# Altium PCB power_out.PcbDoc
Units mm, origin at the board's own origin, x right, y up, seen from the top; angles counter-clockwise.
Board outline 137.5 x 113 mm, 2 copper layers (Top Layer, Bottom Layer); 52 components, 28 nets, 141 pads, 0 vias.
Unrouted connection lines stored in the file: 92.
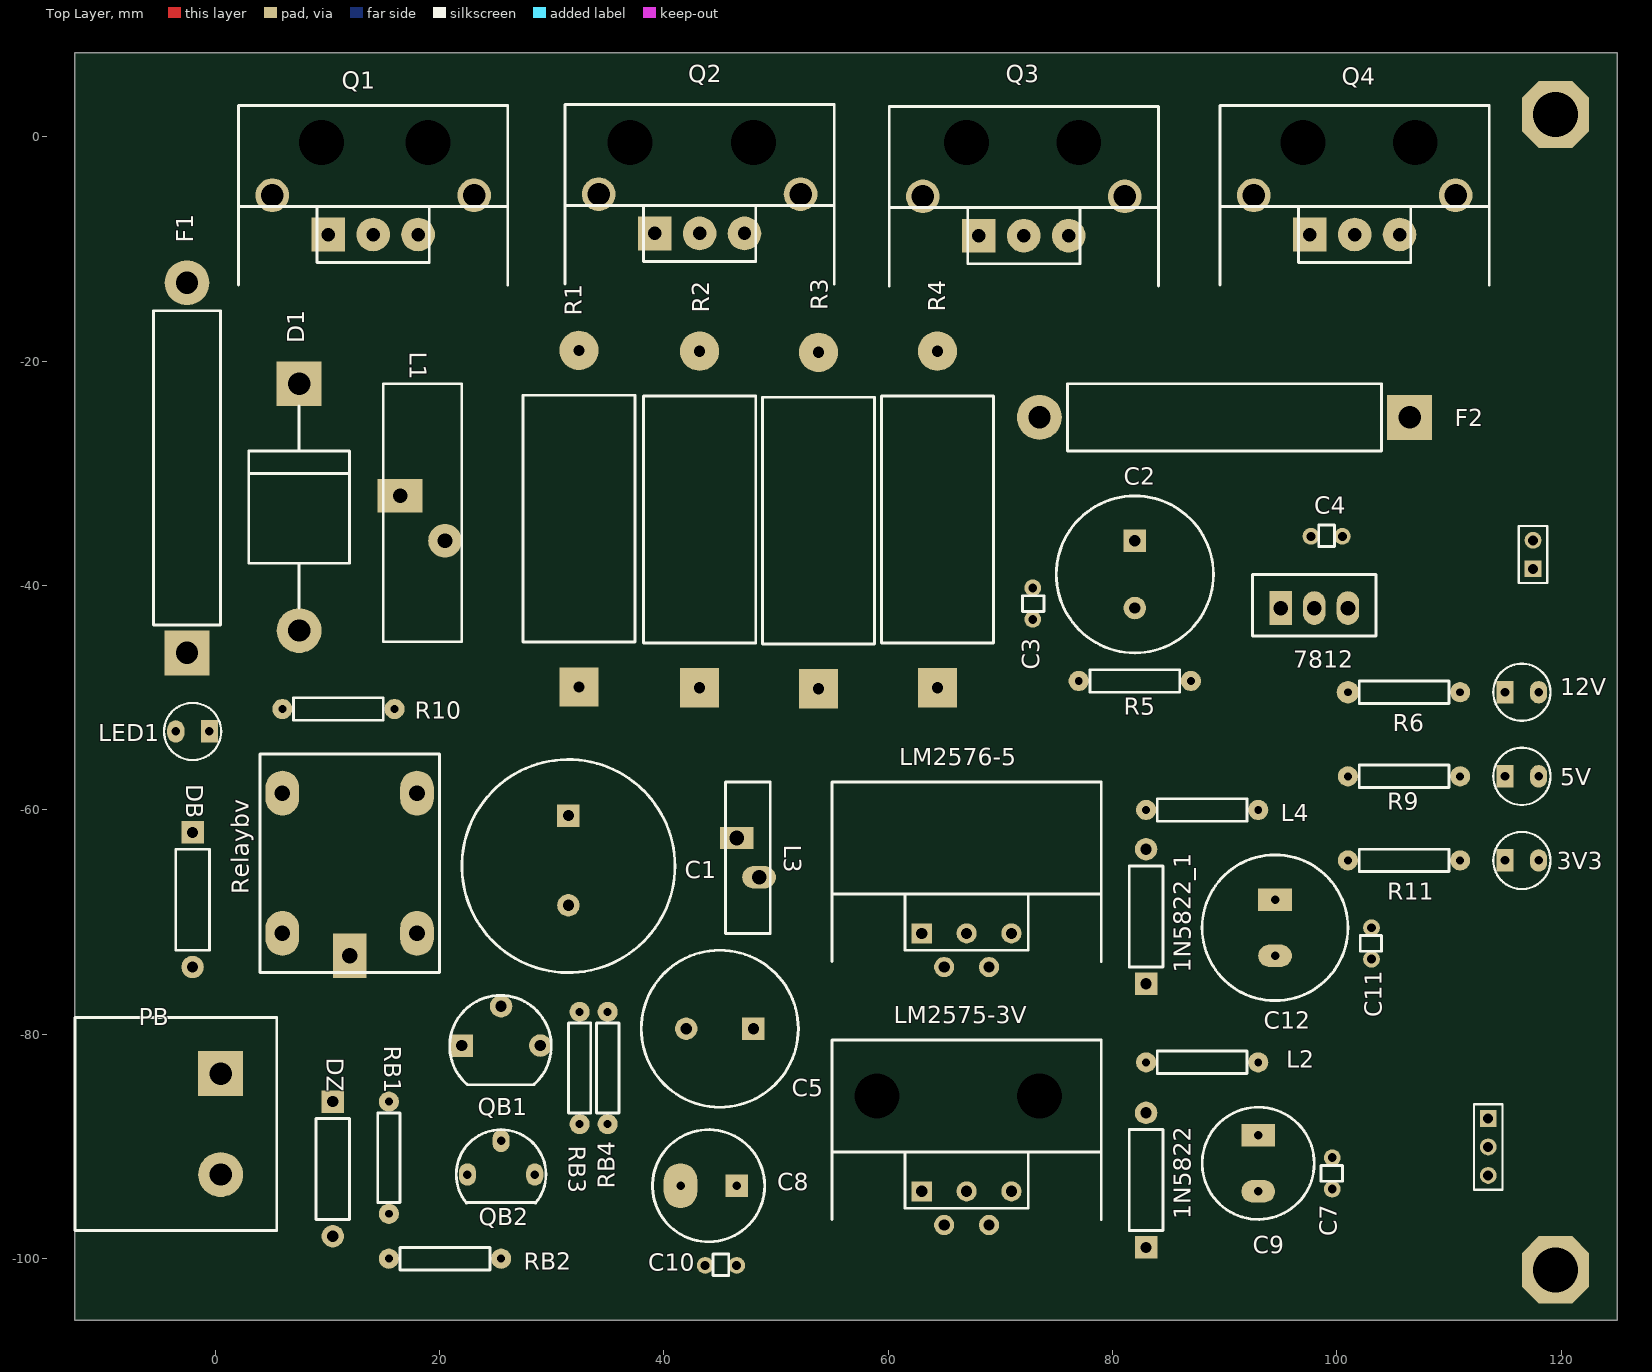
[diagram p0: Top Layer view]
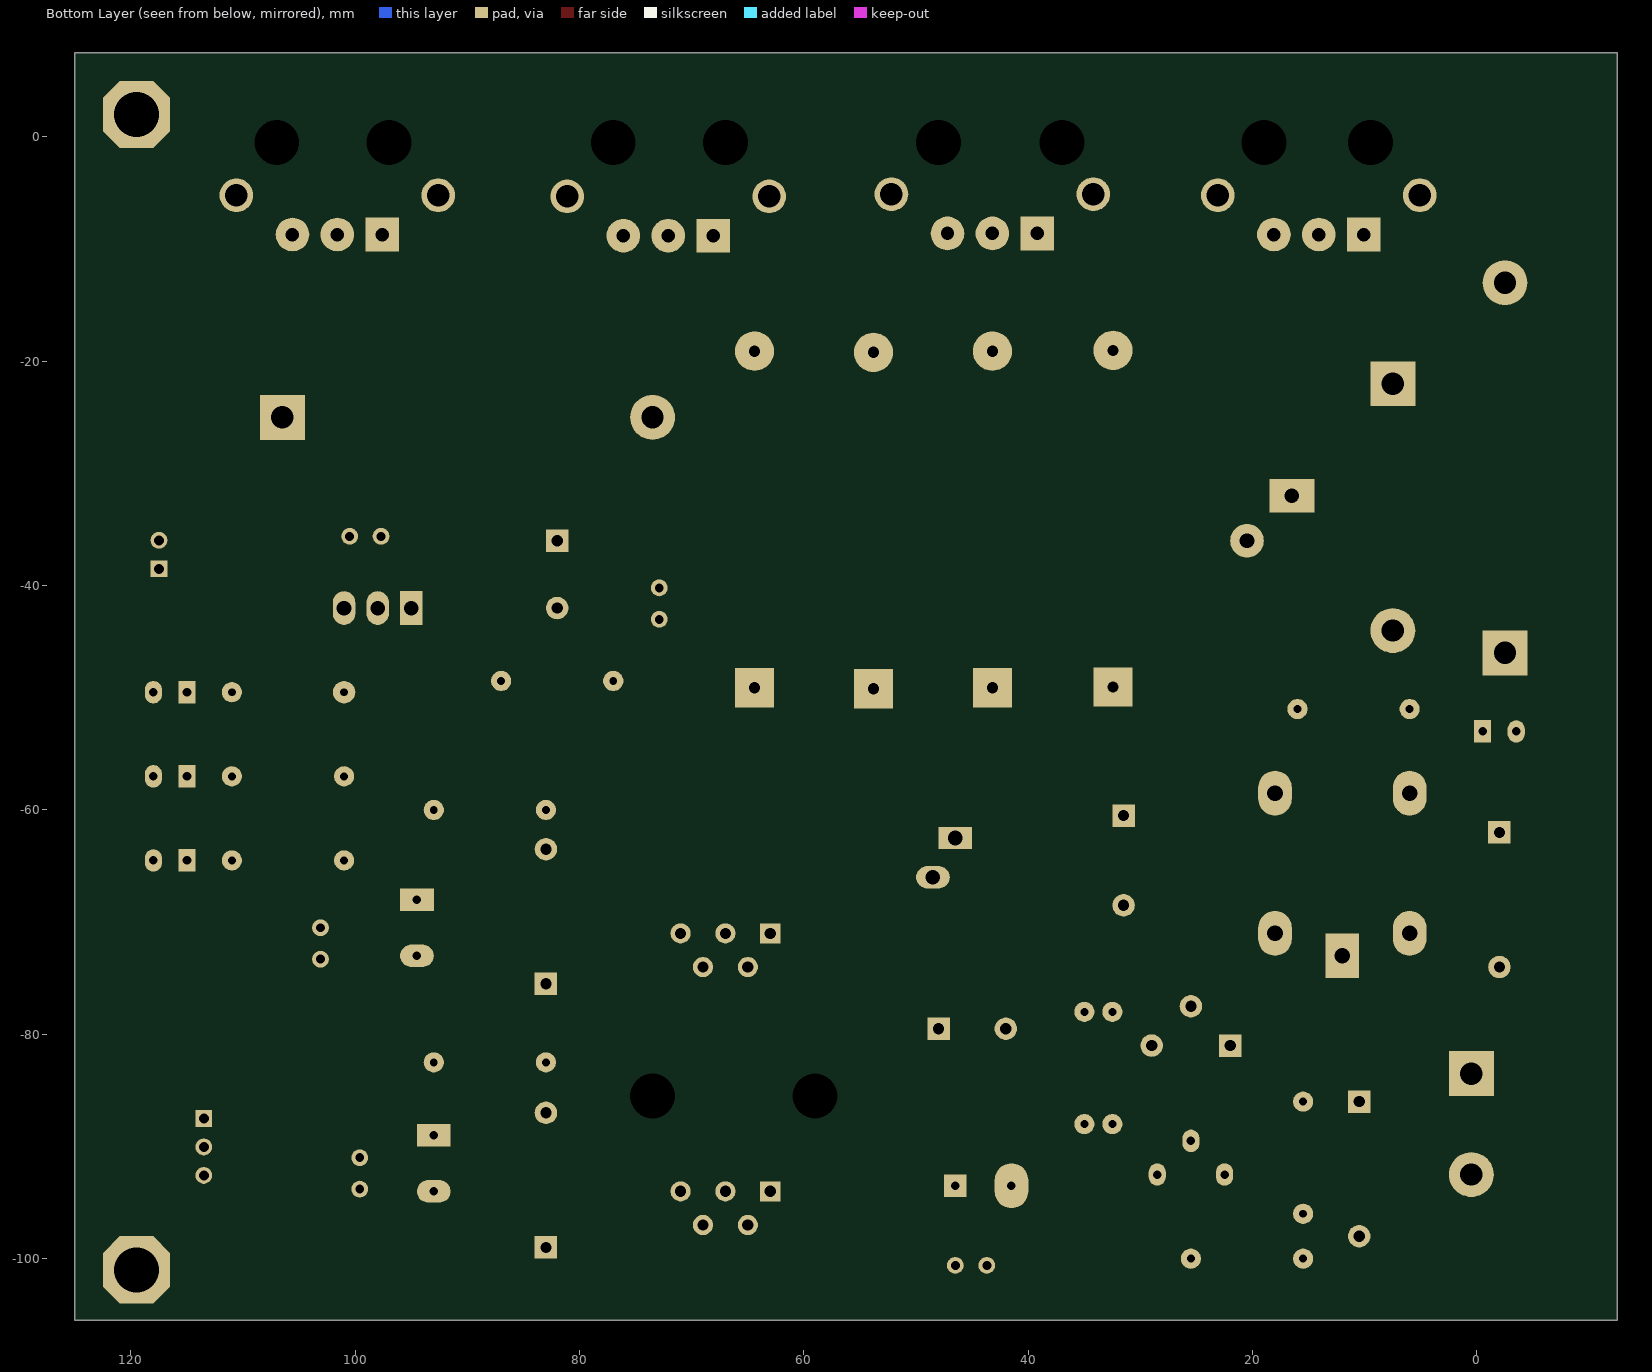
[diagram p1: Bottom Layer view, seen from below]

## Layer stack, top to bottom
Top Layer: signal copper 0.0356
Dielectric: dielectric 0.32, FR-4, Dk 4.8
Bottom Layer: signal copper 0.0356

## Board outline
-12.5,7.5 125,7.5 125,-105.5 -12.5,-105.5 -12.5,7.5

## Design rules (kind name [scope] priority, off if disabled: settings)
Clearance [All] p1: gap=0.254
FabricationTestPointUsage TestPointUsage [All] p1: valid=0 allowmultiple=FALSE
FabricationTestpoint Testpoint [All] p1: side=3 testpointundercomponent=TRUE minsize=1.016 maxsize=2.54 preferedsize=1.524 minholesize=0 maxholesize=1.016 preferedholesize=0.813 testpointgrid=0.025 allowsidetop=TRUE allowsidebottom=TRUE usegrid=TRUE gridtolerance=0
PolygonConnect [All] p1: connectstyle=Relief reliefconductorwidth=0.254 reliefentries=4 polygonreliefangle="90 Angle"
RoutingVias [All] p1: holewidth=0.711 width=1.27 viastyle="Through Hole" minholewidth=0.711 minwidth=1.27 maxholewidth=0.711 maxwidth=1.27
SilkscreenOverComponentPads [All] p1: minsilkscreentomaskgap=0.254
SolderMaskExpansion [All] p1: expansion=0.102
Width [All] p1: maxlimit=0.254 minlimit=0.254 preferedwidth=0.254
25 further rules are at their usual default settings.

## Components (designator, comment, footprint, x,y, rotation, side; value= is the part's Value field where it differs from the comment)
1N5822 "Diode" D_1A 83,-99 r90 top
1N5822_1 "Diode" D_1A 83,-75.5 r90 top
3V3 "LED" LED_3 116,-64.5 r0 top (schematic designator LED4)
5V "LED" LED_3 116,-57 r0 top (schematic designator LED2)
12V "LED" LED_3 116,-49.5 r0 top (schematic designator LED3)
7812 "Volt Reg" 78xx_NO 97.5,-42 r0 top
C1 "Cap2" "Tu 4700u/35V" 31.5,-60.5 r270 top
C2 "Cap2" "Tu 1000u/50V" 82,-36 r270 top
C3 "Cap Semi" tu_gom 73,-42 r270 top
C4 "Cap Semi" tu_gom 99.5,-35.5 r0 top
C5 "Cap2" "Tu 1000u/50V" 48,-79.5 r180 top
C7 "Cap Semi" tu_gom 99.5,-92 r90 top
C8 "Cap2" "TU 220uF/50V" 46.5,-93.5 r180 top
C9 "Cap2" Tu1000uF/16V 93,-91.5 r270 top
C10 "Cap Semi" tu_gom 45.5,-100.5 r0 top
C11 "Cap Semi" tu_gom 103,-71.5 r90 top
C12 "Cap2" "Tu 1000u/35V" 94.5,-73 r270 top
D1 "Diode" D_10A 7.5,-30 r270 top
DB "Diode" D_1A -2,-62 r270 top
DZ "D Zener 30V" D_1A 10.5,-86 r270 top
F1 "Fuse 1" FUSE_10A -2.5,-46 r90 top
F2 "Fuse 2" FUSE_10A 106.5,-25 r180 top
L1 "Inductor" "Cuon cam to" 13.5,-33 r0 top
L2 "Inductor" R_Nor#1 88,-82.5 r0 top
L3 "Inductor" "Cuon cam nho" 44.5,-63.5 r0 top
L4 "Inductor" R_Nor#1 88,-60 r0 top
LED1 "LED" LED_3 -1.5,-53 r180 top
LM2575-3V "LM2575-xx" LM2575_3 63,-94 r0 top
LM2576-5 "LM2576-5" LM2575_3 63,-71 r0 top (schematic designator 1)
PB "Header 2" Coc2_20A 0.5,-84 r270 top
Power1 "Header 2H" HDR1X2 117.5,-38.5 r90 top
Power2 "Header 3" HDR1X3 113.5,-87.5 r270 top
Q1 "TIP42C" TIP42C 13.1,-12.2 r0 top
Q2 "TIP42C" TIP42C 42.2,-12.1 r0 top
Q3 "TIP42C" TIP42C 71.1,-12.3 r0 top
Q4 "TIP42C" TIP42C 100.6,-12.2 r0 top
QB1 "D468" D468/A1013 23,-81 r0 top
QB2 "2N3904" C1815 25,-92 r0 top
R1 "Res3" R_CS1R/5W 32.441,-49.026 r90 top
R2 "Res3" R_CS1R/5W 43.2,-49.1 r90 top
R3 "Res3" R_CS1R/5W 53.8,-49.2 r90 top
R4 "Res3" R_CS1R/5W 64.4,-49.1 r90 top
R5 "Res3" R_Nor#1 82,-48.5 r0 top
R6 "Res3" R_Nor#2 106,-49.5 r180 top
R9 "Res3" R_Nor#1 106,-57 r180 top
R10 "Res3" R_Nor#1 11,-51 r0 top
R11 "Res3" R_Nor#1 106,-64.5 r180 top
RB1 "Res3" R_Nor#1 15.5,-91 r90 top
RB2 "Res3" R_Nor#1 20.5,-100 r0 top
RB3 "Res3" R_Nor#1 32.5,-83 r90 top
RB4 "Res3" R_Nor#1 35,-83 r90 top
Relaybv "Relay-SPDT" "Role 12V" 16,-62.5 r270 top

## Footprints (in the part's own frame and the unit in brackets; to place one, negate y for a bottom-side part, rotate by r counter-clockwise, add the part's x,y. Pads: shape width x height; smd on the part's side, far side on the other; paste and mask are expansions set on the pad)
78xx_NO [mm]
  rect 2x3 hole 1.3: 1(-2.5,0)
  oval 2x3 hole 1.3: 2(0.5,0) 3(3.5,0)
  silkscreen extent -5,-2.5 6,3
C1815 [mm]
  oval 1.524x2 hole 0.762: 1(3.5,-0.5) 2(0.5,2.5) 3(-2.5,-0.5)
  silkscreen extent -3.5,-3.06 4.5,3.5
Coc2_20A [mm]
  rect 4x4 hole 2: 1(-0.5,0)
  round 4 hole 2: 2(8.5,0)
  silkscreen extent -5.5,-13 13.5,5
"Cuon cam nho" [mm]
  rect 3x2 hole 1.3: 1(2,1)
  oval 3x2 hole 1.3: 2(4,-2.5)
  silkscreen extent 1,-7.5 5,6
"Cuon cam to" [mm]
  rect 4x3 hole 1.3: 1(3,1)
  round 3 hole 1.3: 2(7,-3)
  silkscreen extent 1.5,-12 8.5,11
D468/A1013 [mm]
  rect 2x2 hole 1: 1(-1,0)
  round 2 hole 1: 2(2.5,3.5) 3(6,0)
  silkscreen extent -2.08,-3.5 6.97,4.47
D_1A [mm]
  rect 2x2 hole 1: 1(0,0)
  round 2 hole 1: 2(12,0)
  silkscreen extent 1.5,-1.5 10.5,1.5
D_10A [mm]
  rect 4x4 hole 2: 1(-8,0)
  round 4 hole 2: 2(14,0)
  silkscreen extent -6,-4.5 12,4.5
FUSE_10A [mm]
  rect 4x4 hole 2: 1(0,0)
  round 4 hole 2: 2(33,0)
  silkscreen extent 2.5,-3 30.5,3
HDR1X2 [mm] "Connector; Header; 2 Position"
  rect 1.5x1.5 hole 0.9: 1(0,0)
  round 1.5 hole 0.9: 2(2.54,0)
  silkscreen extent -1.27,-1.27 3.81,1.27
HDR1X3 [mm] "Connector; Header; 3 Position"
  rect 1.5x1.5 hole 0.9: 1(0,0)
  round 1.5 hole 0.9: 2(2.54,0) 3(5.08,0)
  silkscreen extent -1.27,-1.27 6.35,1.27
LED_3 [mm]
  rect 1.524x2 hole 0.762: 1(-1,0)
  oval 1.524x2 hole 0.762: 2(2,0)
  silkscreen extent -2.05,-2.55 3.05,2.55
LM2575_3 [mm]
  rect 1.8x1.8 hole 1: 1(0,0)
  round 1.8 hole 1: 2(2,-3) 3(4,0) 4(6,-3) 5(8,0)
  silkscreen extent -8,-2.5 16,13.5
R_CS1R/5W [mm]
  rect 3.5x3.5 hole 1: 1(0,0)
  round 3.5 hole 1: 2(30,0)
  silkscreen extent 4,-5 26,5
R_Nor#1 [mm]
  round 1.8 hole 0.7: 1(-5,0) 2(5,0)
  silkscreen extent -4,-1 4,1
R_Nor#2 [mm]
  round 1.8 hole 0.7: 1(-5,0)
  round 2 hole 0.7: 2(5,0)
  silkscreen extent -4,-1 4,1
"Role 12V" [mm]
  rect 4x3 hole 1.4: 1(10.5,-4)
  oval 4x3 hole 1.4: 2(-4,-10) 3(-4,2) 4(8.5,2) 5(8.5,-10)
  silkscreen extent -7.5,-12 12,4
TIP42C [mm]
  rect 3x3 hole 1.2: 1(-3,3.5)
  round 3 hole 1.2: 2(1,3.5) 3(5,3.5)
  round 3 hole 2: 4(-8,7) 6(10,7)
  silkscreen extent -11,-1 13,15
Tu1000uF/16V [mm]
  rect 2x3 hole 0.762: 1(-2.5,0)
  oval 2x3 hole 0.762: 2(2.5,0)
  silkscreen extent -5,-5 5,5
"TU 220uF/50V" [mm]
  rect 2x2 hole 0.762: 1(0,0)
  oval 3x4 hole 0.762: 2(5,0)
  silkscreen extent -2.5,-5 7.5,5
"Tu 1000u/35V" [mm]
  rect 2x3 hole 0.762: 1(-5,0)
  oval 2x3 hole 0.762: 2(0,0)
  silkscreen extent -9,-6.5 4,6.5
"Tu 1000u/50V" [mm]
  rect 2x2 hole 1: 1(0,0)
  round 2 hole 1: 2(6,0)
  silkscreen extent -4,-7 10,7
"Tu 4700u/35V" [mm]
  rect 2x2 hole 1: 1(0,0)
  round 2 hole 1: 2(8,0)
  silkscreen extent -5,-9.5 14,9.5
tu_gom [mm]
  round 1.5 hole 0.8: 1(-1.8,-0.1) 2(1,-0.1)
  silkscreen extent -1.1,-1 0.3,0.9

## Part data
7812: "Voltage Regulator"
C1 C2 C5 C8 C9 C12: "Capacitor"
C3 C4 C7 C10 C11: "Capacitor (Semiconductor SIM Model)"
DZ: library part "D Zener", "Zener Diode"
F1: library part "Fuse 2", "Fuse"
F2: "Fuse"
LM2575-3V LM2576-5: library part LM2575-3V
PB: "Header, 2-Pin"
Power1: "Header, 2-Pin, Right Angle"
Power2: "Header, 3-Pin"
Q1 Q2 Q3 Q4: library part PNP, "PNP Bipolar Transistor"
QB1: library part NPN, "NPN Bipolar Transistor"
QB2: "NPN General Purpose Amplifier"
R1 R2 R3 R4 R5 R6 R9 R10 R11 RB1 RB2 RB3 RB4: "Resistor"
Relaybv: "Single-Pole Dual-Throw Relay"

## Free pads (board coordinates)
  round 0 hole 4: 41(9.5,-0.5) 41(19,-0.5) 41(37,-0.5) 41(48,-0.5) 41(59,-85.5) 41(67,-0.5) 41(73.5,-85.5) 41(77,-0.5) 41(97,-0.5) 41(107,-0.5)
  oct 6x6 hole 4: 43(119.5,2) 44(119.5,-101)

## Nets (pads, with @x,y where several pads share a name; then routed paths per layer and width w, separated by ;. In a path a pad name is that pad's centre, name@x,y a point inside that pad or via, vN(x,y) a via of type N, cw(c..) or ccw(c..) an arc to the next point about the centre after c; other vN are vias at no path point)
3V: C9.1 C11.2 L2.2 LM2575-3V.4 Power2.2 R11.2
5V: C7.2 C12.1 L4.2 LM2576-5.4 Power2.1 R9.2
12V: F2.2 Power1.1 R6.2
GND: 1N5822.1 1N5822_1.1 3V3.2 5V.2 12V.2 7812.2 C1.2 C2.2 C3.1 C4.1 C5.2 C7.1 C8.2 C9.2 C10.1 C11.1 C12.2 LED1.2 LM2575-3V.3 LM2575-3V.5 LM2576-5.3 LM2576-5.5 PB.2 Power1.2 Power2.3 QB1.1 RB4.1
Net1_1: C5.1 C8.1 C10.2 L3.2 LM2575-3V.1 LM2576-5.1
Net1_2: 1N5822_1.2 L4.1 LM2576-5.2
Net1N5822_2: 1N5822.2 L2.1 LM2575-3V.2
Net7812_1: 7812.1 C2.1 Q1.1 Q2.1 Q3.1 Q4.1 R5.2
Net7812_3: 7812.3 C4.2 F2.1 Q1.2 Q2.2 Q3.2 Q4.2
NetC1_1: C1.1 D1.2 L1.1 R10.2
NetC3_2: C3.2 L1.2 L3.1 R1.1 R2.1 R3.1 R4.1 R5.1
NetD1_1: D1.1 F1.2
NetDB_1: DB.1 QB1.2 Relaybv.5
NetDB_2: DB.2 DZ.2 PB.1 RB2.1 Relaybv.1 Relaybv.4
NetDZ_1: DZ.1 RB1.2
NetF1_1: F1.1 Relaybv.2
NetLED1_1: LED1.1 R10.1
NetLED2_1: 5V.1 R9.1
NetLED3_1: 12V.1 R6.1
NetLED4_1: 3V3.1 R11.1
NetQ1_3: Q1.3 R1.2
NetQ2_3: Q2.3 R2.2
NetQ3_3: Q3.3 R3.2
NetQ4_3: Q4.3 R4.2
NetQB1_3: QB1.3 RB3.2 RB4.2
NetQB2_1: QB2.1 RB3.1
NetQB2_2: QB2.2 RB2.2
NetQB2_3: QB2.3 RB1.1
pads on no net: Q1.4 Q1.6 Q2.4 Q2.6 Q3.4 Q3.6 Q4.4 Q4.6 Relaybv.3